# Altium PCB keyboard.PcbDoc
Units mm, origin at the board's own origin, x right, y up, seen from the top; angles counter-clockwise.
Board outline 37 x 49 mm, 2 copper layers (Top Layer, Bottom Layer); 9 components, 6 nets, 34 pads, 0 vias.
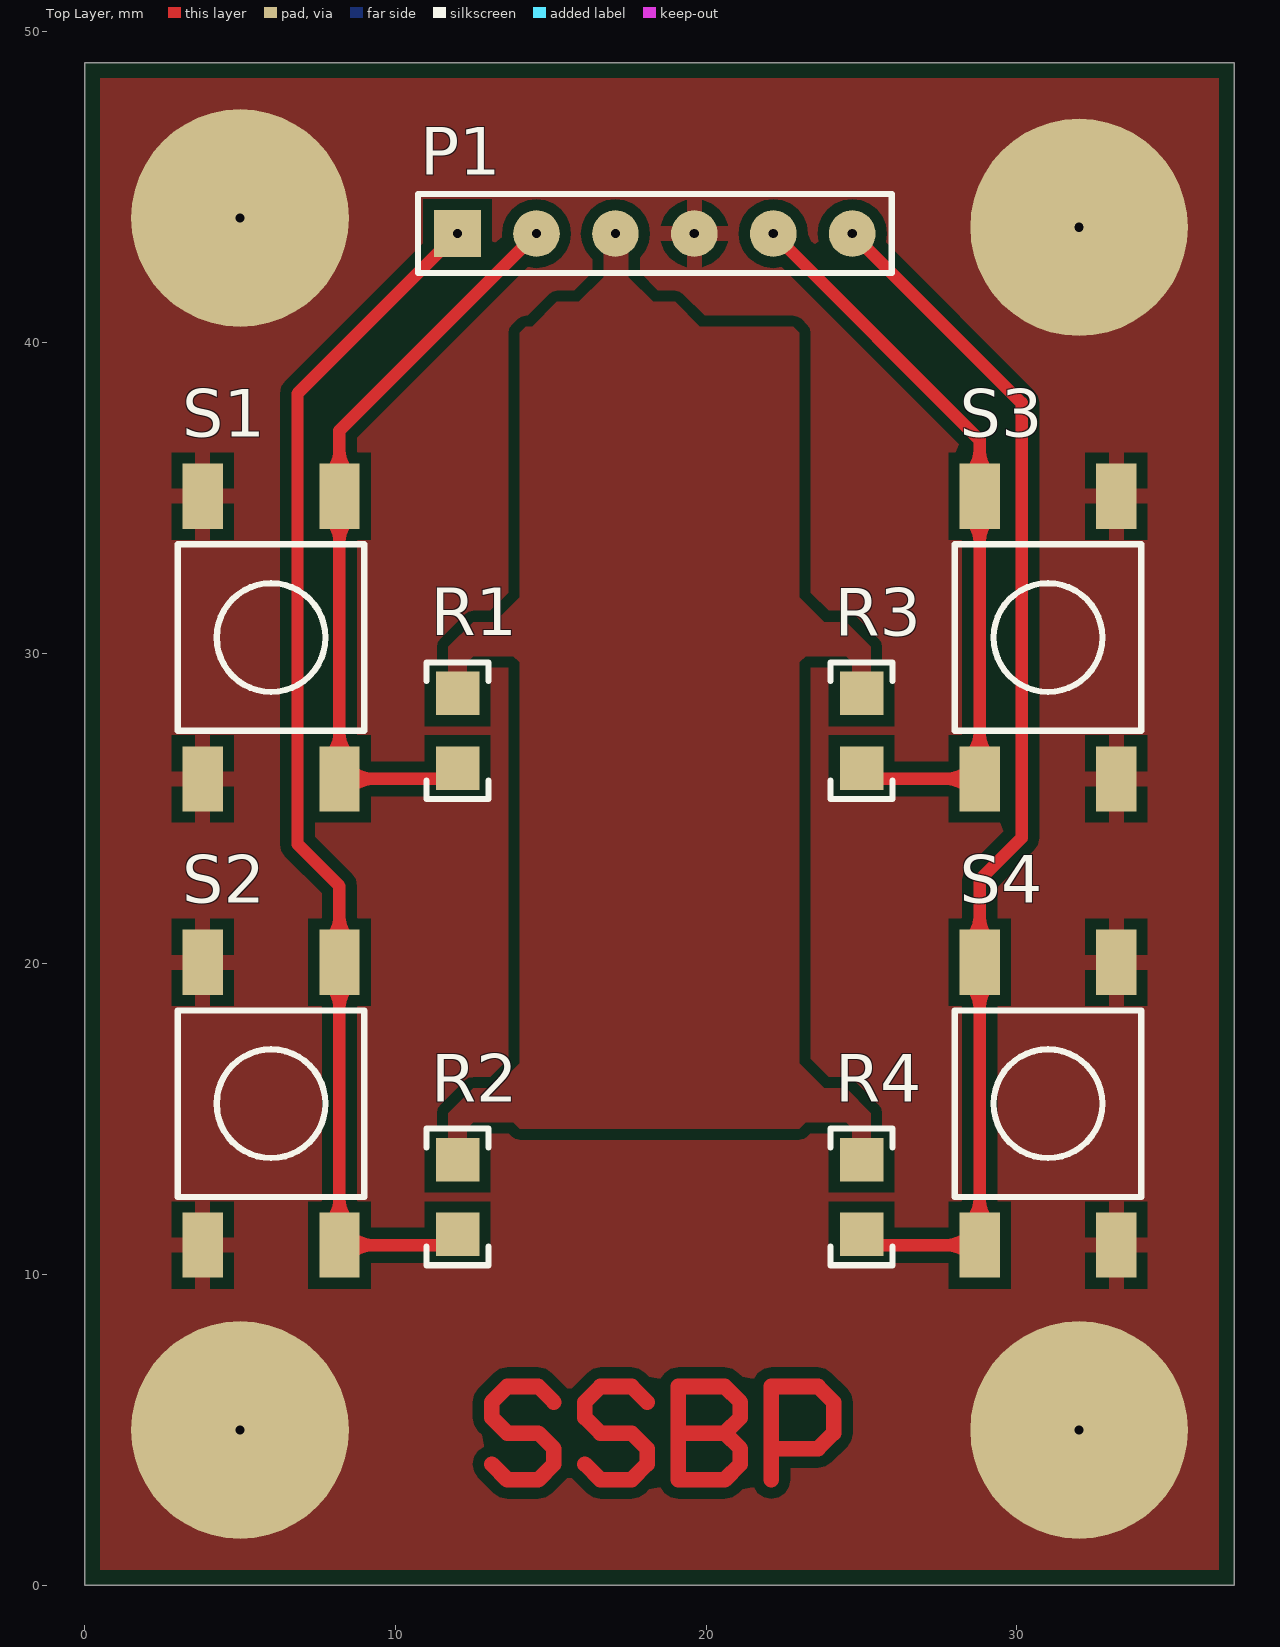
[diagram p0: Top Layer view]
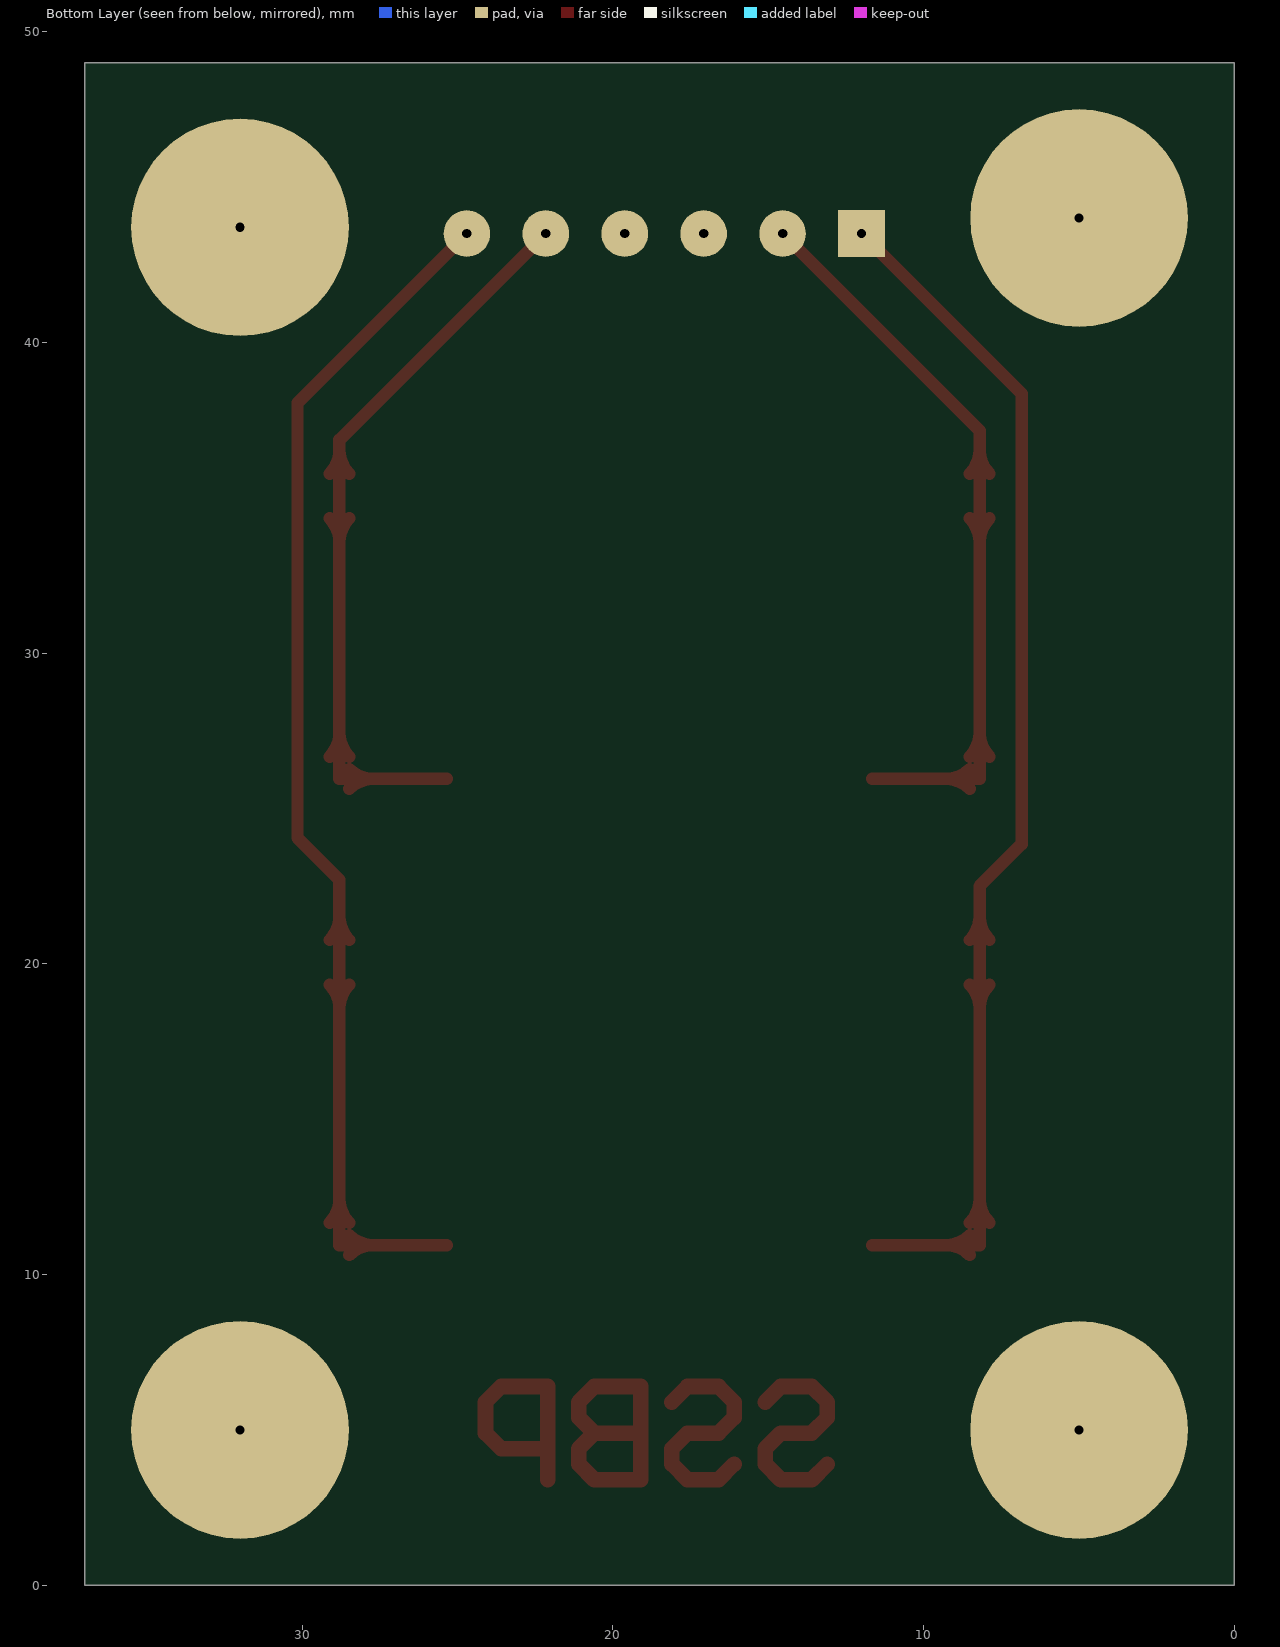
[diagram p1: Bottom Layer view, seen from below]

## Layer stack, top to bottom
Top Layer: signal copper 0.0356
Dielectric: dielectric 0.32, FR-4, Dk 4.8
Bottom Layer: signal copper 0.0356

## Board outline
0,49 37,49 37,0 0,0

## Design rules (kind name [scope] priority, off if disabled: settings)
Clearance "Polygon Clearance" [InPolygon] p1: gap=0.35
Clearance [All] p2: gap=0.254
HoleSize [All] p1: absolutevalues=TRUE maxlimit=5 minlimit=0.025 maxpercent=80.000 minpercent=20.000
PlaneClearance [All] p1: clearance=0.6
PolygonConnect "Polygon to mounting holes" [All vs (PadXSize_AllLayers = 7) And (PadYSize_AllLayers = 7)] p1: connectstyle=Direct reliefconductorwidth=0.254 reliefentries=4 polygonreliefangle="90 Angle"
PolygonConnect "Power polygon" [InNet(VDD)] p2: connectstyle=Direct reliefconductorwidth=0.254 reliefentries=4 polygonreliefangle="90 Angle"
PolygonConnect [All] p3: connectstyle=Relief reliefconductorwidth=0.5 reliefentries=4 polygonreliefangle="90 Angle"
RoutingLayers [All] p1: top layer_v5=TRUE bottom layer_v5=FALSE
RoutingVias [All] p1: holewidth=0.711 width=1.27 viastyle="Through Hole" minholewidth=0.711 minwidth=1.27 maxholewidth=0.711 maxwidth=1.27
SilkscreenOverComponentPads [All] p1: minsilkscreentomaskgap=0.2
SolderMaskExpansion [All] p1: expansion=0.102
Width [All] p1: maxlimit=5 minlimit=0.4 preferedwidth=0.4
24 further rules are at their usual default settings.

## Components (designator, comment, footprint, x,y, rotation, side; value= is the part's Value field where it differs from the comment)
P1 "Header" HDR1X6 12,43.5 r0 top
R1 "10k" 0805 12,27.5 r90 top
R2 "10k" 0805 12,12.5 r90 top
R3 "10k" 0805 25,27.5 r90 top
R4 "10k" 0805 25,12.5 r90 top
S1 "UP" Switch 6,30.5 r0 top
S2 "DOWN" Switch 6,15.5 r0 top
S3 "OK" Switch 31,30.5 r180 top
S4 "CANCEL" Switch 31,15.5 r180 top

## Footprints (in the part's own frame and the unit in brackets; to place one, negate y for a bottom-side part, rotate by r counter-clockwise, add the part's x,y. Pads: shape width x height; smd on the part's side, far side on the other; paste and mask are expansions set on the pad)
0805 [mm]
  rect 1.4x1.4 smd: 1(-1.2,0) 2(1.2,0)
  silkscreen extent -2.2,-1 2.2,1
HDR1X6 [mm] "Connector; Header; 6 Position"
  rect 1.5x1.5 hole 0.3: 1(0,0)
  round 1.5 hole 0.3: 2(2.54,0) 3(5.08,0) 4(7.62,0) 5(10.16,0) 6(12.7,0)
  silkscreen extent -1.27,-1.27 13.97,1.27
Switch [mm] "Tactile Switch"
  rect 1.3x2.1 smd: 1(-2.2,-4.55) 1(-2.2,4.55) 2(2.2,-4.55) 2(2.2,4.55)
  silkscreen extent -3,-3 3,3

## Part data
P1: library part "Header 6", "Header, 6-Pin"
R1 R2 R3 R4: library part Resistor, "Resistor"
S1 S2 S3 S4: library part Switch, "Tactile Switch"

## Free pads (board coordinates)
  round 7 hole 0.3 unplated: 0(5,5) 0(5,44) 0(32,5) 0(32,43.7)

## Nets (pads, with @x,y where several pads share a name; then routed paths per layer and width w, separated by ;. In a path a pad name is that pad's centre, name@x,y a point inside that pad or via, vN(x,y) a via of type N, cw(c..) or ccw(c..) an arc to the next point about the centre after c; other vN are vias at no path point)
NetP1_1: P1.1 R2.1 S2.2 | length 45.5
  Top Layer w0.4: S2.2@7.882,11.668 ccw(c7.114,12.436) 8.2,12.436 ccw(c9.286,12.436) S2.2@8.518,11.668 ; S2.2@7.882,19.332 cw(c7.114,18.564) 8.2,18.564 cw(c9.286,18.564) S2.2@8.518,19.332 ; S2.2@7.882,20.768 ccw(c7.114,21.536) 8.2,21.536 ccw(c9.286,21.536) S2.2@8.518,20.768 ; S2.2@8.518,10.632 cw(c9.286,9.864) 9.286,10.95 cw(c9.286,12.036) S2.2@8.518,11.268 ; R2.1@11.65,10.95 8.2,10.95 8.2,20.05 8.2,22.5 6.85,23.85 6.85,38.35 P1.1
NetP1_2: P1.2 R1.1 S1.2 | length 30.5
  Top Layer w0.4: S1.2@7.882,26.668 ccw(c7.114,27.436) 8.2,27.436 ccw(c9.286,27.436) S1.2@8.518,26.668 ; S1.2@7.882,34.332 cw(c7.114,33.564) 8.2,33.564 cw(c9.286,33.564) S1.2@8.518,34.332 ; S1.2@7.882,35.768 ccw(c7.114,36.536) 8.2,36.536 ccw(c9.286,36.536) S1.2@8.518,35.768 ; S1.2@8.518,25.632 cw(c9.286,24.864) 9.286,25.95 cw(c9.286,27.036) S1.2@8.518,26.268 ; R1.1@11.65,25.95 8.2,25.95 8.2,35.05 8.2,37.16 P1.2
NetP1_5: P1.5 R3.1 S3.2 | length 30.6
  Top Layer w0.4: P1.5 28.8,36.86 28.8,35.05 28.8,25.95 R3.1@25.35,25.95 ; S3.2@28.482,25.632 ccw(c27.714,24.864) 27.714,25.95 ccw(c27.714,27.036) S3.2@28.482,26.268 ; S3.2@28.482,26.668 ccw(c27.714,27.436) 28.8,27.436 ccw(c29.886,27.436) S3.2@29.118,26.668 ; S3.2@28.482,34.332 cw(c27.714,33.564) 28.8,33.564 cw(c29.886,33.564) S3.2@29.118,34.332 ; S3.2@28.482,35.768 ccw(c27.714,36.536) 28.8,36.536 ccw(c29.886,36.536) S3.2@29.118,35.768
NetP1_6: P1.6 R4.1 S4.2 | length 45.6
  Top Layer w0.4: P1.6 30.15,38.05 30.15,24.05 28.8,22.7 28.8,20.05 28.8,10.95 R4.1@25.35,10.95 ; S4.2@28.482,10.632 ccw(c27.714,9.864) 27.714,10.95 ccw(c27.714,12.036) S4.2@28.482,11.268 ; S4.2@28.482,11.668 ccw(c27.714,12.436) 28.8,12.436 ccw(c29.886,12.436) S4.2@29.118,11.668 ; S4.2@28.482,19.332 cw(c27.714,18.564) 28.8,18.564 cw(c29.886,18.564) S4.2@29.118,19.332 ; S4.2@28.482,20.768 ccw(c27.714,21.536) 28.8,21.536 ccw(c29.886,21.536) S4.2@29.118,20.768
VDD: P1.3 R1.2 R2.2 R3.2 R4.2
VSS: P1.4 pad.0 S1.1 S2.1 S3.1 S4.1
copper on no net: | length 36.2
  Top Layer w0.5: 13.1,3.9 13.6,3.4 14.6,3.4 15.1,3.9 15.1,4.4 14.6,4.9 13.6,4.9 13.1,5.4 13.1,5.9 13.6,6.4 14.6,6.4 15.1,5.9 ; 16.1,3.9 16.6,3.4 17.6,3.4 18.1,3.9 18.1,4.4 17.6,4.9 16.6,4.9 16.1,5.4 16.1,5.9 16.6,6.4 17.6,6.4 18.1,5.9 ; 19.1,4.9 20.6,4.9 ; 22.1,3.4 22.1,6.4 23.6,6.4 24.1,5.9 24.1,4.9 23.6,4.4 22.1,4.4 ; 20.6,4.9 21.1,4.4 21.1,3.9 20.6,3.4 19.1,3.4 19.1,6.4 20.6,6.4 21.1,5.9 21.1,5.4 20.6,4.9

## Polygon pours and split planes (outlines as drawn)
VSS on Top Layer "Top Layer-No Net" (solid, remove dead copper, pour order 1000): 0.5,48.5 36.5,48.5 36.5,0.5 0.5,0.5
VDD on Top Layer "Top Layer-No Net" (solid, pour order 1000): 17.5,43.5 17.5,42.1 18.3,41.3 19,41.3 19.8,40.5 22.8,40.5 23,40.3 23,31.8 23.8,31 24.5,31 25.3,30.2 25.3,29 25,28.7 24.7,29 24.7,29.7 24.5,29.9 23.2,29.9 23,29.7 23,16.8 23.8,16 24.5,16 25.3,15.2 25.3,14 25,13.7 24.7,14 24.7,14.7 24.5,14.9 23.2,14.9 23,14.7 14,14.7 13.8,14.9 12.5,14.9 12.3,14.7 12.3,14 12,13.7 11.7,14 11.7,15.2 12.5,16 13.2,16 14,16.8 14,29.7 13.8,29.9 12.5,29.9 12.3,29.7 12.3,29 12,28.7 11.7,29 11.7,30.2 12.5,31 13.2,31 14,31.8 14,40.3 14.2,40.5 14.4,40.5 15.2,41.3 15.9,41.3 16.7,42.1 16.7,43.5

## Silkscreen, mask and mechanical layers (free items; w line width, h text height)
PCB Outline:
  the board outline again, w0.01
Notes:
  text "NOTE: hole sizes are set to 0.3mm" at 0,51.2 h1